# Altium PCB PCB1.PcbDoc
Units mm, origin at the board's own origin, x right, y up, seen from the top; angles counter-clockwise.
Board outline 250 x 60 mm, 2 copper layers (Top Layer, Bottom Layer); 46 components, 120 nets, 287 pads, 73 vias.
Unrouted connection lines stored in the file: 23.
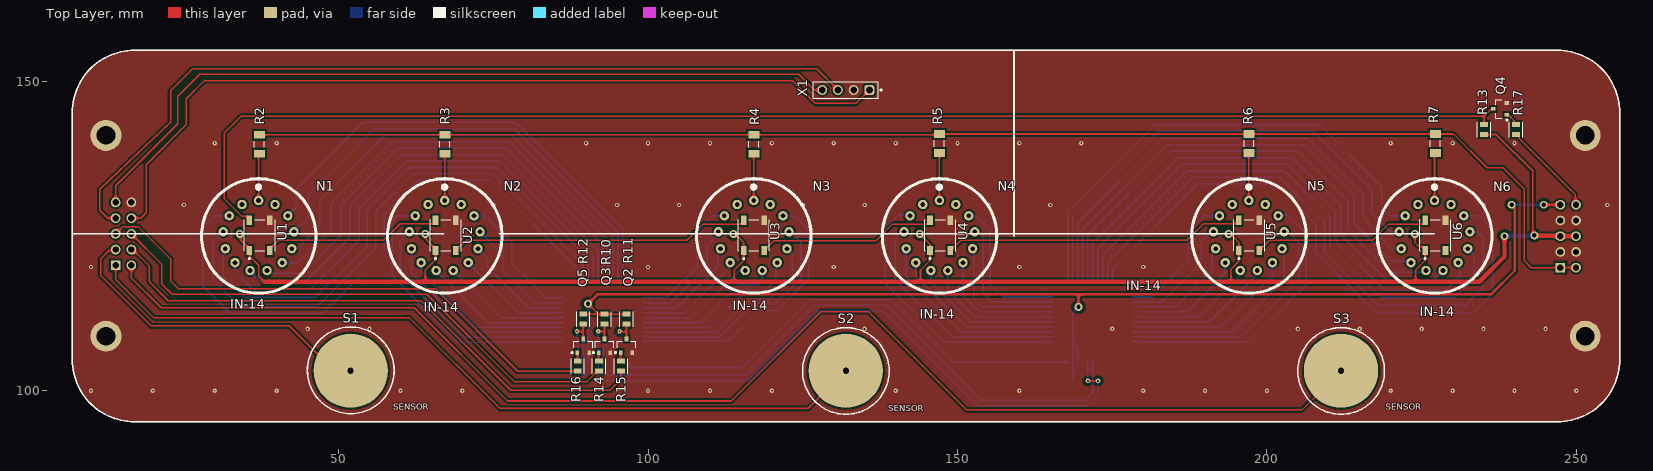
[diagram p0: Top Layer view]
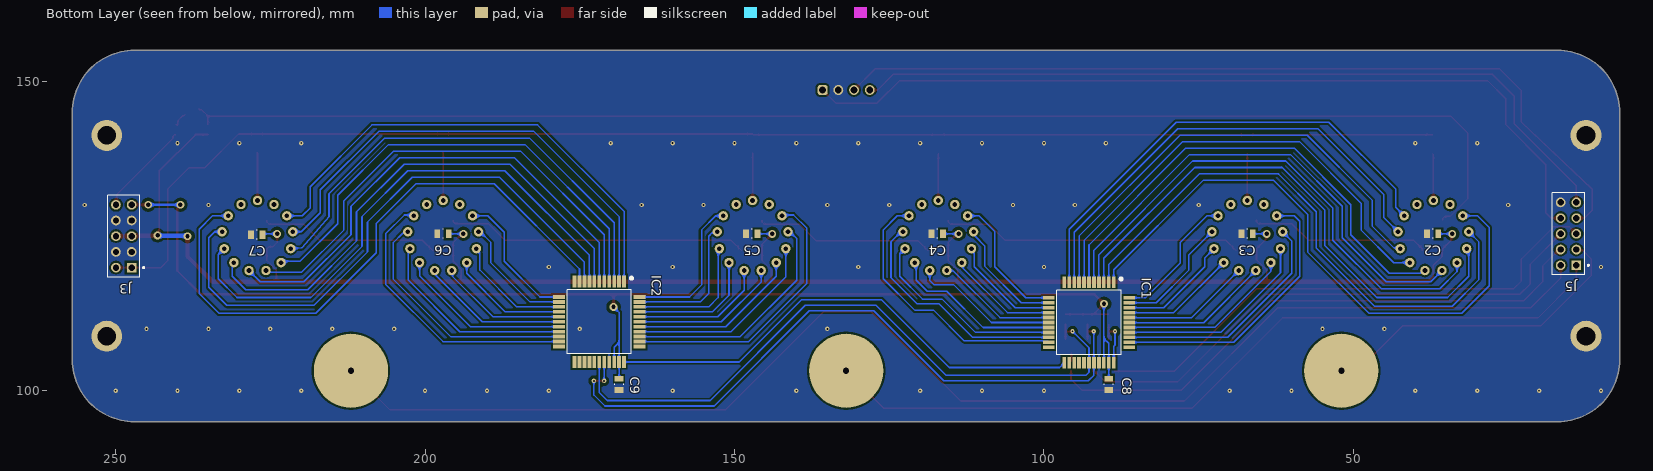
[diagram p1: Bottom Layer view, seen from below]

## Layer stack, top to bottom
Top Solder: solder mask 0.0102, Solder Resist, Dk 3.5
Top Layer: signal copper 0.0356
Dielectric 1: dielectric 0.32, FR-4, Dk 4.8
Bottom Layer: signal copper 0.0356
Bottom Solder: solder mask 0.0102, Solder Resist, Dk 3.5

## Board outline
6.985,104.996 6.985,144.996 cw(c16.985,144.996) 16.985,154.996 246.985,154.996 cw(c246.985,144.996) 256.985,144.996 256.985,104.996 cw(c246.985,104.996) 246.985,94.996 16.985,94.996 cw(c16.985,104.996)

## Design rules (kind name [scope] priority, off if disabled: settings)
Clearance [All] p1: gap=0.15 ignorepadtopadclearanceinfootprint=FALSE except(0.3: Track-Poly SMDPad-Poly THPad-Poly; 0.5: Via-Poly)
Height [All] p1: minheight=0 maxheight=70 prefheight=12.7
PolygonConnect [All] p1: connectstyle=Direct reliefconductorwidth=0.254 reliefentries=4 polygonreliefangle="90 Angle" airgapwidth=0.254
RoutingVias [All] p1: holewidth=0.711 width=1.27 viastyle="Through Hole" minholewidth=0.711 minwidth=1.27 maxholewidth=0.711 maxwidth=1.27
SolderMaskExpansion [All] p1: expansion=0.102 istentingtop=FALSE
SupplyNets "Schematic Supply Nets_6" [InNet('DP+12V')] p1: voltage=0.000
SupplyNets "Schematic Supply Nets_5" [InNet('DP_GND')] p2: voltage=0.000
SupplyNets "Schematic Supply Nets_4" [InNet('DP+5V')] p3: voltage=0.000
SupplyNets "Schematic Supply Nets_3" [InNet('+170V')] p4: voltage=0.000
SupplyNets "Schematic Supply Nets_2" [InNet('+5V')] p5: voltage=0.000
SupplyNets "Schematic Supply Nets_1" [InNet('VCC')] p6: voltage=0.000
SupplyNets "Schematic Supply Nets" [InNet('GND')] p7: voltage=0.000
Width [All] p1: maxlimit=1 minlimit=0.254 preferedwidth=0.254
29 further rules are at their usual default settings.

## Components (designator, comment, footprint, x,y, rotation, side; value= is the part's Value field where it differs from the comment)
C2 "100nF" FP-CC0805-0_85-MFG 37.211,125.349 r0 bottom value="100 nF"
C3 "100nF" FP-CC0805-0_85-MFG 67.183,125.348 r0 bottom value="100 nF"
C4 "100nF" FP-CC0805-0_85-MFG 117.221,125.349 r0 bottom value="100 nF"
C5 "100nF" FP-CC0805-0_85-MFG 147.193,125.349 r0 bottom value="100 nF"
C6 "100nF" FP-CC0805-0_85-MFG 197.104,125.349 r0 bottom value="100 nF"
C7 "100nF" FP-CC0805-0_85-MFG 227.203,125.222 r0 bottom value="100 nF"
C8 "100nF" FP-CC0805-0_85-MFG 89.535,101.016 r90 bottom value="100 nF"
C9 "100nF" FP-CC0805-0_85-MFG 168.656,101.016 r90 bottom value="100 nF"
IC1 "HV5222PG-G" QFP80P1390X1390X235-44N 92.724,111.021 r270 bottom
IC2 "HV5222PG-G" QFP80P1390X1390X235-44N 171.845,111.148 r270 bottom
J3 "PEC05DAAN" FP-PEC05DAAN-MFG 248.676,124.968 r90 bottom locked
J5 "PEC05DAAN" FP-PEC05DAAN-MFG 15.25,125.349 r90 bottom
N1 "IN14" IN14 36.985,125.349 r270 top
N2 "IN14" IN14 67.056,125.349 r270 top
N3 "IN14" IN14 116.985,125.349 r270 top
N4 "IN14" IN14 146.985,125.349 r270 top
N5 "IN14" IN14 196.985,125.349 r270 top
N6 "IN14" IN14 226.985,125.349 r270 top
Q2 "SMBT2222A" INF-SOT23_L 96.52,107.264 r90 top
Q3 "SMBT2222A" INF-SOT23_L 92.964,107.264 r90 top
Q4 "SMBT2222A" INF-SOT23_L 237.668,145.542 r180 top
Q5 "SMBT2222A" INF-SOT23_L 89.535,107.264 r90 top
R2 "10kOhm" RESC3116X65X40ML10T20 37.211,139.827 r90 top
R3 "10kOhm" RESC3116X65X40ML10T20 67.183,139.827 r90 top
R4 "10kOhm" RESC3116X65X40ML10T20 117.094,139.827 r90 top
R5 "10kOhm" RESC3116X65X40ML10T20 147.066,139.954 r90 top
R6 "10kOhm" RESC3116X65X40ML10T20 197.104,139.954 r90 top
R7 "10kOhm" RESC3116X65X40ML10T20 227.203,139.954 r90 top
R10 "1K" FP-RC0805-0_6-IPC_C 92.964,111.557 r270 top
R11 "1K" FP-RC0805-0_6-IPC_C 96.52,111.557 r270 top
R12 "1K" FP-RC0805-0_6-IPC_C 89.535,111.557 r270 top
R13 "1K" FP-RC0805-0_6-IPC_C 235.077,142.189 r90 top
R14 "10k" FP-RC0805-0_6-IPC_C 92.075,103.99 r90 top
R15 "10k" FP-RC0805-0_6-IPC_C 95.631,103.99 r90 top
R16 "10k" FP-RC0805-0_6-IPC_C 88.646,103.962 r90 top
R17 "10k" FP-RC0805-0_6-IPC_C 240.256,142.189 r90 top
S1 "" SENS 51.943,103.251 r0 top
S2 "TOUCHPAD" SENS 131.953,103.251 r0 top
S3 "TOUCHPAD" SENS 211.963,103.251 r0 top
U1 "1655" ADA-RGB-1655_V 37.237,125.095 r90 top
U2 "1655" ADA-RGB-1655_V 67.31,125.095 r90 top
U3 "1655" ADA-RGB-1655_V 117.094,125.095 r90 top
U4 "1655" ADA-RGB-1655_V 147.21,125.095 r90 top
U5 "1655" ADA-RGB-1655_V 197.104,125.095 r90 top
U6 "1655" ADA-RGB-1655_V 227.203,125.095 r90 top
X1 "X?" 4X1HEADER 131.953,148.59 r180 top

## Footprints (in the part's own frame and the unit in brackets; to place one, negate y for a bottom-side part, rotate by r counter-clockwise, add the part's x,y. Pads: shape width x height; smd on the part's side, far side on the other; paste and mask are expansions set on the pad)
4X1HEADER [mm] "Pin Header, pitch 2.54 mm, THT, Vertical, single row, 4p"
  rrect50% 1.6x1.6 hole 1.1: 1(-3.81,0)
  round 1.6 hole 1.1: 2(-1.27,0) 3(1.27,0) 4(3.81,0)
  silkscreen extent -5.8,-1.34 5.23,1.34, body extent -5.08,-1.27 5.08,1.27, height 8.57
ADA-RGB-1655_V [mm] "SMD, 4-Leads, Body 5x5mm"
  rect 1.5x0.9 smd: 1(-2.45,1.65) 2(-2.45,-1.65) 3(2.45,-1.65) 4(2.45,1.65)
  silkscreen extent -3.87,-2.5 2.5,2.5, body extent -2.7,-2.5 2.7,2.5, height 1.68
FP-CC0805-0_85-MFG [mm]
  rect 0.95x1.4 smd paste+0 mask+0: 1(-0.925,0) 2(0.925,0)
  silkscreen extent -0.07,-0.73 0.08,0.73, body extent -1,-0.63 1,0.63, height 0.95
FP-PEC05DAAN-MFG [mm]
  rect 1.57x1.57 hole 1.02 paste-2539.97 mask+0: 1(-5.08,-1.27)
  round 1.57 hole 1.02 paste-2539.97 mask+0: 2(-5.08,1.27) 3(-2.54,-1.27) 4(-2.54,1.27) 5(0,-1.27) 6(0,1.27) 7(2.54,-1.27) 8(2.54,1.27) 9(5.08,-1.27) 10(5.08,1.27)
  silkscreen extent -6.61,-3.32 6.61,2.6, body extent -6.35,-2.54 6.35,2.54, height 8.71
FP-RC0805-0_6-IPC_C [mm]
  rect 0.808x1.262 smd paste+0 mask+0: 1(-0.802,0) 2(0.802,0)
  silkscreen extent -1.21,-1.07 1.21,1.07, body extent -1,-0.63 1,0.63, height 0.6
IN14 [mil]
  round 60 hole 30: 1(-212.2,3.54) 2(-186.61,108.27) 3(-114.57,189.76) 4(-13.39,228.35) 5(94.09,214.96) 6(183.07,153.54) 7(233.46,57.48) 8(233.07,-50.79) 9(183.07,-146.46) 10(94.09,-207.87) 11(-13.39,-221.26) 12(-114.57,-183.07) 13(-186.61,-101.97)
  silkscreen extent -351,-360 377,369, body extent -341,-350 368,357, height 2529
INF-SOT23_L [mm] "SOT23, 3-Leads, Body 2.9x1.3 mm, Pitch 0.95 mm, IPC High Density"
  rect 0.75x0.6 smd: 1(-1.1,0.95) 2(-1.1,-0.95) 3(1.1,0)
  silkscreen extent -1.22,-1.5 0.7,1.92, body extent -0.7,-1.5 0.7,1.5, height 1.1
QFP80P1390X1390X235-44N [mm]
  rect 1.9x0.6 smd: 1(-6.5,4) 2(-6.5,3.2) 3(-6.5,2.4) 4(-6.5,1.6) 5(-6.5,0.8) 6(-6.5,0) 7(-6.5,-0.8) 8(-6.5,-1.6) 9(-6.5,-2.4) 10(-6.5,-3.2) 11(-6.5,-4) 23(6.5,-4) 24(6.5,-3.2) 25(6.5,-2.4) 26(6.5,-1.6) 27(6.5,-0.8) 28(6.5,0) 29(6.5,0.8) 30(6.5,1.6) 31(6.5,2.4) 32(6.5,3.2) 33(6.5,4)
  rect 0.6x1.9 smd: 12(-4,-6.5) 13(-3.2,-6.5) 14(-2.4,-6.5) 15(-1.6,-6.5) 16(-0.8,-6.5) 17(0,-6.5) 18(0.8,-6.5) 19(1.6,-6.5) 20(2.4,-6.5) 21(3.2,-6.5) 22(4,-6.5) 34(4,6.5) 35(3.2,6.5) 36(2.4,6.5) 37(1.6,6.5) 38(0.8,6.5) 39(0,6.5) 40(-0.8,6.5) 41(-1.6,6.5) 42(-2.4,6.5) 43(-3.2,6.5) 44(-4,6.5)
  silkscreen extent -7.25,-5.2 5.2,5.4, body extent -6.95,-6.95 6.95,6.95, height 2.35
RESC3116X65X40ML10T20 [mm] "Chip Resistor, 2-Leads, Body 3.10x1.60mm, IPC Low Density"
  rect 1.25x1.8 smd: 1(-1.525,0) 2(1.525,0)
  silkscreen extent -0.5,-0.8 0.5,0.8, body extent -1.6,-0.85 1.6,0.85, height 0.65
SENS [mm]
  round 12 hole 1: SENS(0.007,-0.03)

## Part data
C2 C3 C4 C5 C6 C7 C8 C9: library part CMP-2100-03606-3, "CAP CER 0.1UF 50V X7R 0805", Capacitance="100 nF", Manufacturer=Yageo, Manufacturer Part Number=CC0805KRX7R9BB104, Package=CC0805-0.85, Temperature="-30°C to +85°C", Temperature Characteristic=X7R, Temperature Range High=+85°C, Temperature Range Low=-30°C, Tolerance=0.1, Voltage Rating="50 V", Automotive=No, Category=Cap, ComponentLink2Description=Datasheet, ComponentLink2URL=http://www.yageo.com/documents/recent/UPY-GPHC_Y5V_6.3V-to-50V_8.pdf, Device Class L1="Passive Components", Device Class L2=Capacitors, Device Class L3="Ceramic Capacitors", Digikey Description="CAP CER 0.1UF 50V X7R 0805", Footprint Url=http://www.yageo.com/exep/pages/download/literatures/UPY-C_GEN_24.pdf, Height=0.95mm, Ipc Land Pattern Name=CAPC200125X85, Lead Free=Yes, Material=Ceramic, Mouser Description="Multilayer Ceramic Capacitors MLCC - SMD/SMT 100nF 50V X7R 10%", Octopart=https://octopart.com/cc0805krx7r9bb104-yageo-192993, RoHS=TRUE
IC1 IC2: "Integrated Circuit", Manufacturer_Name=Microchip, Mouser Part Number=689-HV5222PG-G, Arrow Part Number=HV5222PG-G, Arrow Price/Stock=https://www.arrow.com/en/products/hv5222pg-g/microchip-technology, Datasheet Link=http://www.microchip.com/mymicrochip/filehandler.aspx?ddocname=en570722, Height=2.35mm, Manufacturer_Part_Number=HV5222PG-G, Mouser Price/Stock=https://www.mouser.co.uk/ProductDetail/Microchip-Technology/HV5222PG-G?qs=jjdktuRV%2Fgh6FkXzyQ9ehg%3D%3D
J3 J5: library part CMP-25680-000034-1, "CONN HEADER VERT 10POS 2.54MM", Color=Black, Package Quantity=1, Connector Type="Male Pin", Contact Material=Bronze, Contact Mating Length=0.23inch, Contact Plating=Tin, Contact Type="Male Pin", Gender=Male, Height=2.54mm, Housing Color=Black, Housing Material=Plastic, Lead Free="Lead Free", Length=12.7mm, Mount="Through Hole", Number of Contacts=10, Number of Positions=10, Number of Rows=2, Packaging=Bulk, Pitch=0.1inch, Row Spacing=0.1inch, Termination=Solder, Width=5.08mm
Q2 Q3 Q4 Q5: library part CMP-1178-00004-1, "NPN Silicon Switching Transistor, 40 V VCEO, 600 mA IC, SOT23, Reel, Green", Manufacturer=Infineon, ComponentLink1Description="Manufacturer URL", ComponentLink1URL=http://www.infineon.com/, ComponentLink2Description=Datasheet, ComponentLink2URL=http://www.infineon.com/dgdl/smbt2222a_mmbt2222a.pdf?folderId=db3a30431441fb5d011445fab851018e&fileId=db3a30431441fb5d011445fbaff0018f, ComponentLink3Description="Package Specification", ComponentLink3URL=http://www.infineon.com/dgdl/SOT23-Package_Overview.pdf?folderId=db3a30431936bc4b0119532290053c66&fileId=db3a30431936bc4b0119533468123c85, Green=TRUE, IC="150 mA", IC (max)="600 mA", ICBO (max)="10 nA", Mounting Technology="Surface Mount", PackageDescription="3-Pin Small Outline Transistor Package, 1.3 x 2.9 mm Body, 0.95 mm Pitch", PackageReference=SOT23, PackageVersion=Apr-08, Packing=Reel, PartNumber=SMBT2222A, Polarity=NPN, VCBO (max)="75 V", VCE="10 V", VCE (max)="10 V", VCEO (max)="40 V", VEBO (max)="6 V"
R2 R3 R4 R5 R6 R7: library part CMP-2100-03674-1, "Chip Resistor, 100 KOhm, +/- 1%, 0.25 W, -55 to 155 degC, 1206 (3216 Metric), RoHS, Tape and Reel", Case Code (Imperial)=1206, Case Code (Metric)=3216, Manufacturer=Yageo, Max Operating Temperature=155degC, Min Operating Temperature=-55degC, Package Description="2-Pin Surface Mount Device, Body 3.1 x 1.6 mm", Package Reference=1206.0, Power Rating=250mW, Resistance=100KOhm, Temperature Coefficient=100ppm/degreesC, Tolerance=1%, Voltage Rating=200V, Case/Package=1206, Composition=ThickFilm, Datasheet URL=http://www.yageo.com/NewPortal/yageodocoutput?fileName=/pdf/R-Chip/PYu-RC_Group_51_RoHS_L_5.pdf, Datasheet Version="Rev. 5, 10/2016", Depth=1.6mm, Height=0.55mm, Lead Free=LeadFree, Length=3.1mm, Manufacturer URL=http://www.yageo.com/, Packaging=TapeandReel, REACH SVHC=NoSVHC, RoHSCompliant=true, Termination=SMD/SMT
R10 R11 R12 R13 R14 R15 R16 R17: library part CMP-2100-03668-5, "RES 100K OHM 1% 1/8W 0805", Case Code (Imperial)=0805, Case Code (Metric)=2012, Max Operating Temperature=155°C, Max Power Dissipation=125mW, Min Operating Temperature=-55°C, Package Quantity=1, Resistance=100kR, Resistance Tolerance=1%, Resistor Type="Thick Film", Temperature Coefficient=100ppm/°C, Voltage Rating=150V, Case/Package=0805, Construction=Rectangular, Depth=1.25mm, Features="Moisture Resistant", Height=0.024inch, Lead Free="Lead Free", Lead Pitch=0.4mm, Length=0.079inch, Military Standard=Not, Number of Pins=2, Number of Terminations=2, Packaging="Tape and Reel", Power Rating=125mW, RoHS Compliant=Yes, Series=RC, Size Code=0805, Technology="THICK FILM", Termination=SMD/SMT, Tolerance=1%, Voltage Rating (DC)=150V, Width=0.049inch
S1 S2 S3: library part SENS
U1 U2 U3 U4 U5 U6: library part CMP-2000-05026-1, "Intelligent Control LED Integrated Light Source, 3.5 to 5.3 V, -25 to 80 degC, 4-Pin SMD, RoHS, Tape and Reel", Color=Red,Green,Blue(RGB), Manufacturer=Adafruit-Industries-LLC, Package Description="4-Pin Surface Mount Device, Body 5 x 5 mm", Category=Optoelectronics, Configuration=Discrete, Controller Type=-, Datasheet URL=http://datasheet.octopart.com/ADA1655-Adafruit-Industries-datasheet-32028139.pdf, Datasheet Version=May-13, Family=Addressable,Specialty, Interface=-, Manufacturer URL=https://www.adafruit.com/, Mounting Type=SurfaceMount, Number of LEDs=10, Package Reference=1655, Series=Neopixel, Size / Dimension=5.00mmLx5.00mmW, Utilized LED=WS2812(5050)
X1: library part UART_HEEADER

## Free pads (board coordinates)
  round 1.524 hole 0.762: 52(40.64,-2245.589) 53(280.64,-2195.589) 54(514.163,280.467) 54(514.687,240.878) 54(520.64,-2145.589) 55(754.163,330.467) 55(754.687,290.878) 55(760.64,-2095.589) 64(528.006,323.525) 68(768.006,353.525)
  round 5 hole 3: 60(12.416,108.811) 60(12.416,141.252) 60(251.43,108.811) 60(251.43,141.252)

## Via types
v1: diameter 0.7, hole 0.3, Top Layer to Bottom Layer, 61 vias
v2: diameter 1.27, hole 0.711, Top Layer to Bottom Layer, 12 vias

## Nets (pads, with @x,y where several pads share a name; then routed paths per layer and width w, separated by ;. In a path a pad name is that pad's centre, name@x,y a point inside that pad or via, vN(x,y) a via of type N, cw(c..) or ccw(c..) an arc to the next point about the centre after c; other vN are vias at no path point)
+5V: 
+170V: 
DP+5V: C2.1 C3.1 C4.1 C5.1 C6.1 C7.1 J3.5 J3.6 R13.1 U1.1 U2.1 U3.1 U4.1 U5.1 U6.1 | length 307.5
  Top Layer w0.254: v2(34.036,125.349) 34.199,125.186 34.199,124.333 35.587,122.945 U1.1 35.69,122.542 35.69,121.663 37.084,120.269 37.084,118.491 37.973,117.602 ; 64.008,117.602 64.008,119.507 65.659,121.158 65.659,121.285 65.66,121.286 U2.1 65.66,122.945 63.754,124.851 63.754,125.095 v2(64.008,125.349) ; v2(113.792,125.349) 114.046,125.349 115.444,123.951 U3.1 115.444,121.032 113.919,119.507 113.919,117.602 ; v2(143.891,125.349) 145.56,123.68 U4.1 145.56,121.049 144.018,119.507 144.018,117.602 ; v2(193.802,125.349) 194.056,125.349 195.454,123.951 U5.1 195.454,120.905 194.183,119.634 194.183,117.602 ; v2(223.901,125.349) 223.901,123.952 224.585,123.268 225.23,123.268 225.553,122.945 U6.1 225.553,121.032 224.028,119.507 224.028,117.602
  Top Layer w0.3: R13.1 237.073,141.387 242.951,135.509 242.951,125.349 243.011,125.289 v2(243.205,125.095)
  Top Layer w0.5: v2(243.205,125.095) v2@243.268,125.031
  Top Layer w0.7: 37.973,117.602 64.008,117.602 113.919,117.602 144.018,117.602 194.183,117.602 224.028,117.602 234.315,117.602 238.379,121.666 v2(238.379,124.968) ; v2@243.268,125.031 J3.5@247.343,125.031 ; J3.5 J3.6
  Bottom Layer w0.254: v2(34.036,125.349) C2.1 ; v2(64.008,125.349) C3.1 ; v2(113.792,125.349) C4.1 ; v2(143.891,125.349) C5.1 ; v2(193.802,125.349) C6.1 ; v2(223.901,125.349) 226.151,125.349 C7.1 ; v2(238.379,124.968) v2@238.442,125.031 ; v2@243.141,125.031 v2(243.205,125.095)
  Bottom Layer w0.7: v2@238.442,125.031 v2@243.141,125.031
DP+12V: C8.2 C9.2 IC1.31 IC1.32 IC2.31 IC2.32 J3.9 R10.1 R11.1 R12.1 | length 214
  Top Layer w0.254: R12.1 91.984,112.359 ; v2(90.297,114.046) 91.984,112.359 ; R11.1 R10.1 91.984,112.359
  Top Layer w0.4: v2(90.297,114.046) 91.821,115.57 169.545,115.57 ; v2(169.545,113.538) 169.545,115.57 ; v2(239.522,130.048) 239.522,129.899 240.03,129.391 240.03,119.38 236.22,115.57 169.545,115.57 ; v2(244.729,130.048) J3.9
  Bottom Layer w0.254: C8.2 89.524,101.952 IC1.32 89.524,107.671 90.31,108.458 ; v2(90.297,114.046) 90.31,114.033 90.31,108.458 ; IC1.31 90.31,104.534 90.31,108.458 ; C9.2 168.645,101.952 IC2.32 168.645,107.823 ; IC2.31 169.445,107.023 168.645,107.823 ; v2(169.545,113.538) 168.645,112.638 168.645,107.823
  Bottom Layer w0.4: v2(239.522,130.048) v2(244.729,130.048)
DP_CLK_H: IC1.29 IC2.29 Q3.3 R10.2 | length 110.5
  Top Layer w0.254: v1(91.948,109.601) 91.989,109.56 92.964,109.56 ; Q3.3 92.964,109.56 ; R10.2 92.964,109.56 ; v1(171.069,101.6) v1(172.72,101.6)
  Bottom Layer w0.254: v1(91.948,109.601) 91.936,109.589 91.936,104.533 IC1.29 91.924,102.513 92.837,101.6 116.205,101.6 127.508,112.903 137.922,112.903 153.289,97.536 170.942,97.536 172.72,99.314 v1(172.72,101.6) ; IC2.29 171.057,104.636 171.057,101.612 v1(171.069,101.6)
DP_DAT_H: IC1.33 Q5.3 R12.2 | length 8.6
  Top Layer w0.254: v1(88.519,109.601) 88.56,109.56 89.535,109.56 ; Q5.3 89.535,109.56 ; R12.2 89.535,109.56
  Bottom Layer w0.254: v1(88.519,109.601) 88.519,107.385 88.724,107.181 IC1.33
DP_GND: C2.2 C3.2 C4.2 C5.2 C6.2 C7.2 C8.1 C9.1 IC1.30 IC2.30 J3.3 J3.4 J3.7 J3.8 J5.10 pad.60 Q2.2 Q3.2 Q4.2 Q5.2 U1.3 U2.3 U3.3 U4.3 U5.3 U6.3 X1.2 | length 0.1
  Bottom Layer w0.254: IC2.30@170.18,104.583 IC2.30
  other v1: 10,100 20,100 30,100 40,100 60,100 70,100 100,100 110,100 120,100 140,100 160,100 180,100 190,100 200,100 220,100 230,100 240,100 250,100 45,110 55,110 135,110 175,110 205,110 215,110 225,110 235,110 245,110 10,120 100,120 130,120 160,120 180,120 25,130 75,130 95,130 105,130 125,130 135,130 155,130 165,130 235,130 255,130 30,140 40,140 90,140 100,140 110,140 120,140 130,140 140,140 150,140 160,140 170,140 220,140 230,140 240,140
DP_OE_H: IC1.28 IC2.28 Q2.3 R11.2 | length 107.1
  Top Layer w0.254: v1(95.377,109.601) 95.418,109.56 96.52,109.56 ; Q2.3 96.52,109.56 ; R11.2 96.52,109.56
  Bottom Layer w0.254: v1(95.377,109.601) 92.724,106.948 IC1.28 92.724,102.983 93.218,102.489 115.824,102.489 127.127,113.792 138.557,113.792 153.924,98.425 170.561,98.425 171.845,99.709 IC2.28
GND: 
IC1_DOUT: IC1.23 IC2.33 | length 80.1
  Bottom Layer w0.254: IC1.23 97.486,103.759 115.316,103.759 126.238,114.681 139.192,114.681 149.225,104.648 IC2.33
K1_0: IC1.1 N1.12 | length 97.4
  Bottom Layer w0.254: N1.12 29.961,128.259 28.067,126.365 28.067,116.967 32.512,112.522 47.498,112.522 57.404,122.428 57.404,128.524 62.865,133.985 74.295,133.985 88.724,119.556 IC1.1
K1_1: IC1.10 N1.3 | length 77.8
  Bottom Layer w0.254: N1.3 43.18,129.634 43.18,132.588 53.975,143.383 78.613,143.383 95.924,126.072 IC1.10
K1_2: IC1.9 N1.4 | length 76.4
  Bottom Layer w0.254: N1.4 45.085,127.989 45.085,131.699 55.725,142.339 78.387,142.339 95.124,125.602 IC1.9
K1_3: IC1.8 N1.5 | length 76.2
  Bottom Layer w0.254: N1.5 42.554,123.068 43.439,123.068 46.99,126.619 46.99,130.81 57.475,141.295 78.034,141.295 94.324,125.005 IC1.8
K1_4: IC1.7 N1.6 | length 76.6
  Bottom Layer w0.254: N1.6 43.483,120.699 48.768,125.984 48.768,130.302 58.716,140.25 77.555,140.25 93.524,124.281 IC1.7
K1_5: IC1.6 N1.7 | length 78.2
  Bottom Layer w0.254: N1.7 38.789,119.419 39.209,118.999 44.196,118.999 50.419,125.222 50.419,130.048 59.577,139.206 77.075,139.206 92.724,123.557 IC1.6
K1_6: IC1.5 N1.8 | length 80.1
  Bottom Layer w0.254: N1.8 37.522,117.602 44.704,117.602 51.816,124.714 51.816,129.794 60.184,138.162 76.468,138.162 91.924,122.706 IC1.5
K1_7: IC1.4 N1.9 | length 82.8
  Bottom Layer w0.254: N1.9 33.265,119.262 36.068,116.459 45.466,116.459 53.34,124.333 53.34,129.54 60.918,137.118 75.988,137.118 91.124,121.982 IC1.4
K1_8: IC1.3 N1.10 | length 87
  Bottom Layer w0.254: N1.10 31.705,122.615 31.369,122.279 31.369,118.491 34.798,115.062 46.228,115.062 54.61,123.444 54.61,129.159 61.595,136.144 ; 61.595,136.073 75.636,136.073 90.324,121.385 IC1.3
K1_9: IC1.2 N1.11 | length 91.2
  Bottom Layer w0.254: N1.11 29.718,124.042 29.718,117.983 34.036,113.665 46.609,113.665 56.007,123.063 56.007,128.905 62.103,135.001 ; 62.103,135.029 74.902,135.029 89.524,120.407 IC1.2
K2_0: IC1.35 N2.12 | length 44.7
  Bottom Layer w0.254: N2.12 59.552,128.259 58.674,127.381 58.674,118.491 69.342,107.823 IC1.35@86.015,107.823
K2_1: IC1.44 N2.3 | length 21.8
  Bottom Layer w0.254: N2.3 73.671,128.259 77.978,123.952 77.978,120.65 83.607,115.021 IC1.44
K2_2: IC1.43 N2.4 | length 20.4
  Bottom Layer w0.254: N2.4 76.581,121.964 76.581,119.507 81.867,114.221 IC1.43 ; IC1.43@85.472,114.173 85.597,114.048 IC1.43@86.224,114.048
K2_3: IC1.42 N2.5 | length 18.5
  Bottom Layer w0.254: N2.5 74.041,121.434 74.041,120.015 80.635,113.421 IC1.42
K2_4: IC1.41 N2.6 | length 18.6
  Bottom Layer w0.254: N2.6 79.034,112.621 IC1.41
K2_5: IC1.40 N2.7 | length 20.9
  Bottom Layer w0.254: N2.7 76.114,111.821 IC1.40
K2_6: IC1.39 N2.8 | length 23.7
  Bottom Layer w0.254: N2.8 74.197,110.998 IC1.39@86.018,110.998
K2_7: IC1.38 N2.9 | length 28
  Bottom Layer w0.254: N2.9 63.336,119.29 72.39,110.236 IC1.38@86.194,110.236
K2_8: IC1.37 N2.10 | length 32.3
  Bottom Layer w0.254: N2.10 61.776,119.072 71.427,109.421 IC1.37
K2_9: IC1.36 N2.11 | length 37.9
  Bottom Layer w0.254: N2.11 59.944,124.197 59.944,118.999 70.322,108.621 IC1.36
K3_0: IC1.12 N3.12 | length 21.9
  Bottom Layer w0.254: IC1.12 102.956,115.021 107.95,120.015 107.95,125.73 110.479,128.259 N3.12
K3_1: IC1.21 N3.3 | length 44
  Bottom Layer w0.254: IC1.21 99.397,107.994 100.146,107.994 100.196,108.044 112.87,108.044 117.856,113.03 120.904,113.03 125.984,118.11 125.984,125.984 123.709,128.259 N3.3
K3_2: IC1.20 N3.4 | length 37.9
  Bottom Layer w0.254: IC1.20 111.542,108.621 116.967,114.046 120.523,114.046 124.714,118.237 124.714,124.079 123.104,125.689 N3.4
K3_3: IC1.19 N3.5 | length 32.7
  Bottom Layer w0.254: IC1.19 111.072,109.421 116.459,114.808 119.634,114.808 123.317,118.491 123.317,122.087 N3.5
K3_4: IC1.18 N3.6 | length 27.5
  Bottom Layer w0.254: IC1.18 109.84,110.221 115.697,116.078 118.872,116.078 120.642,117.848 120.642,120.456 N3.6
K3_5: IC1.17 N3.7 | length 23.6
  Bottom Layer w0.254: IC1.17 108.481,111.021 114.554,117.094 117.729,117.094 118.445,117.81 N3.7
K3_6: IC1.16 N3.8 | length 19.6
  Bottom Layer w0.254: IC1.16 107.122,111.821 114.701,119.4 115.666,119.4 N3.8
K3_7: IC1.15 N3.9 | length 17.8
  Bottom Layer w0.254: IC1.15 105.89,112.621 113.062,119.793 113.062,120.496 N3.9
K3_8: IC1.14 N3.10 | length 17.9
  Bottom Layer w0.254: IC1.14 104.658,113.421 111.252,120.015 111.252,122.175 111.705,122.628 N3.10
K3_9: IC1.13 N3.11 | length 19.1
  Bottom Layer w0.254: IC1.13 103.68,114.221 109.601,120.142 109.601,123.444 111.122,124.965 111.122,125.446 N3.11
K4_0: IC2.35 N4.12 | length 44.8
  Bottom Layer w0.254: N4.12 142.197,128.397 140.462,128.397 138.303,126.238 138.303,117.348 147.703,107.948 IC2.35
K4_1: IC2.44 N4.3 | length 24.2
  Bottom Layer w0.254: N4.3 153.046,128.259 155.321,125.984 155.321,117.094 157.267,115.148 IC2.44
K4_2: IC2.43 N4.4 | length 22.7
  Bottom Layer w0.254: N4.4 153.003,125.471 153.675,125.471 154.178,124.968 154.178,115.697 155.527,114.348 IC2.43
K4_3: IC2.42 N4.5 | length 21.3
  Bottom Layer w0.254: N4.5 152.648,122.756 152.648,115.068 154.168,113.548 IC2.42
K4_4: IC2.41 N4.6 | length 20.8
  Bottom Layer w0.254: N4.6 150.885,115.434 153.571,112.748 IC2.41
K4_5: IC2.40 N4.7 | length 21.9
  Bottom Layer w0.254: N4.7 148.445,116.223 152.72,111.948 IC2.40
K4_6: IC2.39 N4.8 | length 24.2
  Bottom Layer w0.254: N4.8 145.695,117.576 152.123,111.148 IC2.39
K4_7: IC2.38 N4.9 | length 27.7
  Bottom Layer w0.254: N4.9 143.265,118.482 151.399,110.348 IC2.38
K4_8: IC2.37 N4.10 | length 31.9
  Bottom Layer w0.254: N4.10 141.705,118.391 150.548,109.548 IC2.37
K4_9: IC2.36 N4.11 | length 37.8
  Bottom Layer w0.254: N4.11 141.056,125.689 139.954,124.587 139.954,117.856 149.062,108.748 IC2.36
K5_0: IC2.12 N5.12 | length 22.2
  Bottom Layer w0.254: IC2.12 181.442,115.148 187.198,120.904 187.198,125.603 189.854,128.259 N5.12
K5_1: IC2.21 N5.3 | length 45.9
  Bottom Layer w0.254: IC2.21 197.102,107.948 206.375,117.221 206.375,125.349 203.327,128.397 201.943,128.397 N5.3
K5_2: IC2.20 N5.4 | length 39.6
  Bottom Layer w0.254: IC2.20 195.87,108.748 205.105,117.983 205.105,123.952 203.611,125.446 203.028,125.446 N5.4
K5_3: IC2.19 N5.5 | length 33
  Bottom Layer w0.254: IC2.19 194.384,109.548 202.714,117.878 202.714,122.175 202.688,122.201 202.688,122.716 N5.5
K5_4: IC2.18 N5.6 | length 28.1
  Bottom Layer w0.254: IC2.18 192.644,110.348 200.885,118.589 N5.6
K5_5: IC2.17 N5.7 | length 23.9
  Bottom Layer w0.254: IC2.17 190.777,111.148 198.202,118.573 198.202,119.176 N5.7
K5_6: IC2.16 N5.8 | length 20.9
  Bottom Layer w0.254: IC2.16 189.037,111.948 195.552,118.463 195.552,119.286 N5.8
K5_7: IC2.15 N5.9 | length 18.2
  Bottom Layer w0.254: 179.316,112.776 187.071,112.776 193.265,118.97 N5.9
K5_8: IC2.14 N5.10 | length 19
  Bottom Layer w0.254: IC2.14@178.345,113.538 185.166,113.538 191.135,119.507 191.135,122.175 191.705,122.745 N5.10
K5_9: IC2.13 N5.11 | length 19.7
  Bottom Layer w0.254: IC2.13 183.055,114.348 189.357,120.65 189.357,123.952 191.094,125.689 N5.11
K6_0: IC2.1 N6.12 | length 79.7
  Bottom Layer w0.254: IC2.1 167.845,128.983 181.815,142.953 208.583,142.953 218.567,132.969 218.567,129.54 219.848,128.259 N6.12
K6_1: IC2.10 N6.3 | length 97.9
  Bottom Layer w0.254: IC2.10 175.045,119.673 188.8,133.428 201.478,133.428 207.899,127.007 207.899,122.301 217.678,112.522 233.299,112.522 236.474,115.697 236.474,126.111 234.326,128.259 N6.3
K6_2: IC2.9 N6.4 | length 92.7
  Bottom Layer w0.254: IC2.9 174.245,120.778 187.953,134.486 202.064,134.486 209.296,127.254 209.296,122.428 217.932,113.792 232.029,113.792 234.95,116.713 234.95,124.714 233.975,125.689 N6.4
K6_3: IC2.8 N6.5 | length 87.7
  Bottom Layer w0.254: IC2.8 173.445,121.883 187.107,135.545 202.783,135.545 210.185,128.143 210.185,123.317 218.44,115.062 230.378,115.062 233.426,118.11 233.426,121.978 N6.5
K6_4: IC2.7 N6.6 | length 83.8
  Bottom Layer w0.254: IC2.7 172.645,122.988 186.26,136.603 203.376,136.603 211.074,128.905 211.074,124.206 218.948,116.332 228.981,116.332 231.14,118.491 231.14,119.915 231.128,119.927 231.128,120.456 N6.6
K6_5: IC2.6 N6.7 | length 80.3
  Bottom Layer w0.254: IC2.6 171.845,123.966 185.54,137.661 204.096,137.661 211.963,129.794 211.963,125.222 219.583,117.602 226.628,117.602 N6.7
K6_6: IC2.5 N6.8 | length 78.8
  Bottom Layer w0.254: IC2.5 171.045,125.198 184.567,138.72 205.069,138.72 213.106,130.683 213.106,125.984 219.964,119.126 224.911,119.126 224.971,119.186 225.452,119.186 N6.8
K6_7: IC2.4 N6.9 | length 77.8
  Bottom Layer w0.254: IC2.4 170.245,126.176 183.847,139.778 205.916,139.778 214.122,131.572 214.122,127 220.18,120.942 223.022,120.942 N6.9
K6_8: IC2.3 N6.10 | length 77.2
  Bottom Layer w0.254: IC2.3 169.445,127.154 183.113,140.822 206.523,140.822 215.519,131.826 215.519,128.098 219.86,123.148 219.934,123.075 220.029,123.069 N6.10
K6_9: IC2.2 N6.11 | length 77.8
  Bottom Layer w0.254: IC2.2 168.645,128.132 182.408,141.895 207.482,141.895 216.916,132.461 216.916,128.778 220.005,125.689 N6.11
LED_DAT_H: Q4.3 R13.2 U1.4 | length 224.4
  Top Layer w0.254: U1.4 35.587,127.845 35.264,128.168 34.392,128.168 31.496,131.064 31.496,141.605 34.268,144.377 235.077,144.377 ; R13.2 235.077,144.377 ; Q4.3 236.395,145.369 236.069,145.369 235.077,144.377
NetC1_2: 
NetD1_2: 
NetF1_2: 
NetF3_2: 
NetJ2_10: 
NetJ3_1: J3.1 J3.2 R2.2 R3.2 R4.2 R5.2 R6.2 R7.2 | length 228.8
  Top Layer w0.254: R2.2 R3.2@66.929,141.352 ; J3.2 J3.1 242.697,119.888 241.554,121.031 241.554,132.588 238.123,136.019 235.583,136.019 230.123,141.479 R7.2 R6.2 R5.2 146.938,141.351 R4.2 R4.2 116.84,141.352 R3.2 ; R3.2@66.929,141.352 R3.2 ; R3.2@66.929,141.352 R3.2
NetJ3_10: J3.10 R17.1 | length 15.5
  Top Layer w0.254: R17.1 240.444,141.387 240.721,141.11 240.721,140.787 249.815,131.693 249.815,130.179 J3.10
NetJ4_7: 
NetJ5_1: J5.1 S2.SENS | length 131.4
  Top Layer w0.254: J5.1 13.98,117.973 20.193,111.76 61.468,111.76 76.073,97.155 125.894,97.155 S2.SENS
NetJ5_2: J5.2 S3.SENS | length 220.9
  Top Layer w0.254: J5.2 16.52,118.227 21.336,113.411 62.23,113.411 77.301,98.34 113.453,98.34 127.889,112.776 135.636,112.776 151.511,96.901 205.65,96.901 S3.SENS
NetJ5_3: J5.3 S1.SENS | length 52.5
  Top Layer w0.254: J5.3 13.862,122.691 12.963,122.691 11.557,121.285 11.557,118.618 19.685,110.49 42.023,110.49 49.292,103.221 S1.SENS
NetJ5_4: J5.4 R15.1 | length 92.1
  Top Layer w0.254: J5.4 16.764,122.809 19.431,120.142 19.431,117.602 22.479,114.554 63.328,114.554 77.806,100.076 93.853,100.076 95.631,101.854 R15.1
NetJ5_5: J5.5 R16.1 | length 86.9
  Top Layer w0.254: J5.5 14.859,126.228 14.859,126.238 15.082,126.461 17.684,126.461 22.86,121.285 22.86,117.729 24.13,116.459 65.659,116.459 78.958,103.16 R16.1
NetJ5_6: J5.6 R14.1 | length 88
  Top Layer w0.254: J5.6 21.463,120.406 21.463,117.221 23.114,115.57 64.262,115.57 78.359,101.473 90.133,101.473 91.848,103.188 R14.1
NetJ5_7: J5.7 X1.3 | length 138
  Top Layer w0.254: J5.7 12.7,127.889 11.43,129.159 11.43,132.569 22.86,143.383 22.86,148.463 26.416,152.019 127.254,152.019 X1.3
NetJ5_8: J5.8 X1.1 | length 137.9
  Top Layer w0.254: J5.8 18.034,127.889 18.923,128.778 18.923,136.525 25.4,143.002 25.4,147.193 28.321,150.114 123.317,150.114 127,146.431 133.604,146.431 X1.1
NetJ5_9: J5.9 X1.4 | length 128
  Top Layer w0.254: J5.9 13.98,133.106 24.003,143.129 24.003,147.574 27.559,151.13 124.333,151.13 126.873,148.59 X1.4
NetMD4_SHDN: 
NetMD5_SCL: 
NetMD5_SDA: 
NetMD6_OUT: 
NetMD6_PON: 
NetMD8_SPK+: 
NetMD8_SPK-: 
NetMD9_CLK: 
NetMD9_CMD: 
NetMD9_D0: 
NetMD9_D1: 
NetMD9_D2: 
NetMD9_D3: 
NetN1_1: N1.1 R2.1 | length 7.6
  Top Layer w0.254: N1.1 37.075,138.166 R2.1
NetN2_1: N2.1 R3.1 | length 7.6
  Top Layer w0.254: N2.1 67.146,138.265 R3.1
NetN3_1: N3.1 R4.1 | length 7.6
  Top Layer w0.254: N3.1 117.075,138.283 R4.1
NetN4_1: N4.1 R5.1 | length 7.7
  Top Layer w0.254: R5.1 147.075,138.42 N4.1
NetN5_1: N5.1 R6.1 | length 7.7
  Top Layer w0.254: N5.1 197.075,138.4 R6.1
NetN6_1: N6.1 R7.1 | length 7.8
  Top Layer w0.254: N6.1 227.075,138.428 227.076,138.429 R7.1
NetQ1_1: 
NetQ2_1: Q2.1 R15.2 | length 1.4
  Top Layer w0.254: Q2.1 95.57,104.853 R15.2
NetQ3_1: Q3.1 R14.2 | length 1.4
  Top Layer w0.254: Q3.1 92.014,104.853 R14.2
NetQ4_1: Q4.1 R17.2 | length 2.6
  Top Layer w0.254: Q4.1 238.941,144.419 239.159,144.419 239.93,143.648 239.93,143.014 240.029,142.915 240.104,142.991 R17.2
NetQ5_1: Q5.1 R16.2 | length 1.4
  Top Layer w0.254: Q5.1 88.585,104.825 R16.2
NetR1_2: 
NetR9_2: 
NetU1_2: U1.2 U2.4 | length 29.1
  Top Layer w0.254: U1.2 38.887,122.945 40.275,124.333 57.277,124.333 59.944,127 65.337,127 65.66,127.323 U2.4
NetU2_2: U2.2 U3.4 | length 48.7
  Top Layer w0.254: U2.2 70.648,124.333 106.299,124.333 108.888,126.922 115.121,126.922 115.444,127.245 U3.4
NetU3_2: U3.2 U4.4 | length 29
  Top Layer w0.254: U3.2 120.305,124.206 136.779,124.206 139.503,126.93 145.237,126.93 145.56,127.253 U4.4
NetU4_2: U4.2 U5.4 | length 48.8
  Top Layer w0.254: U4.2 150.548,124.333 187.071,124.333 189.738,127 195.131,127 195.454,127.323 U5.4
NetU5_2: U5.2 U6.4 | length 29
  Top Layer w0.254: U5.2 200.442,124.333 217.043,124.333 219.632,126.922 225.23,126.922 225.553,127.245 U6.4
VCC: 
pads on no net: IC1.11 IC1.22 IC1.24 IC1.25 IC1.26 IC1.27 IC1.34 IC2.11 IC2.22 IC2.23 IC2.24 IC2.25 IC2.26 IC2.27 IC2.34 N1.2 N1.13 N2.2 N2.13 N3.2 N3.13 N4.2 N4.13 N5.2 N5.13 N6.2 N6.13 U6.2

## Polygon pours and split planes (outlines as drawn)
DP_GND on Bottom Layer "DP_GND_L02_P004" (solid, remove dead copper, pour order 4): 6.985,104.996 6.985,144.996 cw(c16.985,144.996) 16.985,154.996 246.985,154.996 cw(c246.985,144.996) 256.985,144.996 256.985,104.996 cw(c246.985,104.996) 246.985,94.996 16.985,94.996 cw(c16.985,104.996)
DP_GND on Top Layer "DP_GND_L01_P003" (solid, remove dead copper, pour order 3): 6.985,104.996 6.985,144.996 cw(c16.985,144.996) 16.985,154.996 246.985,154.996 cw(c246.985,144.996) 256.985,144.996 256.985,104.996 cw(c246.985,104.996) 246.985,94.996 16.985,94.996 cw(c16.985,104.996)

## Silkscreen, mask and mechanical layers (free items; w line width, h text height)
Top Overlay:
  circle w0.254: c51.965,103.289 r7
  circle w0.254: c211.978,103.192 r7
  circle w0.254: c131.968,103.192 r7
  lines w0.254: 7.112,125.349 37.112,125.349 ; 36.985,125.349 66.985,125.349 ; 75.965,125.349 125.965,125.349 ; 116.985,125.349 146.985,125.349 196.985,125.349 226.985,125.349 ; 159.131,124.968 159.131,154.968 ; 6.985,104.996 ccw(c16.985,104.996) 16.985,94.996 246.985,94.996 ccw(c246.985,104.996) 256.985,104.996 256.985,144.996 ccw(c246.985,144.996) 246.985,154.996 16.985,154.996 ccw(c16.985,144.996) 6.985,144.996 6.985,104.996
Top Designator:
  lines w0.254: 12.416,108.811 12.416,124.998 ; 12.416,124.938 12.416,141.125

## Text inside footprints (layer, text, board x,y; h text height)
N1: Top Overlay "IN-14" at 32.512,113.284 h1.52
N2: Top Overlay "IN-14" at 63.754,112.776 h1.52
N3: Top Overlay "IN-14" at 113.665,113.03 h1.52
N4: Top Overlay "IN-14" at 143.891,111.633 h1.52
N5: Top Overlay "IN-14" at 177.292,116.205 h1.52
N6: Top Overlay "IN-14" at 224.663,112.014 h1.52
S1: Top Overlay "SENSOR" at 58.801,96.901 h1
S2: Top Overlay "SENSOR" at 138.811,96.647 h1
S3: Top Overlay "SENSOR" at 219.202,96.901 h1